# Altium PCB Power Supply.PcbDoc (part 2 of 2)
Units mm, origin at the board's own origin, x right, y up, seen from the top; angles counter-clockwise.
Board outline 95 x 55 mm, 2 copper layers (Top Layer, Bottom Layer); 70 components, 47 nets, 218 pads, 358 vias.
Unrouted connection lines stored in the file: 83.
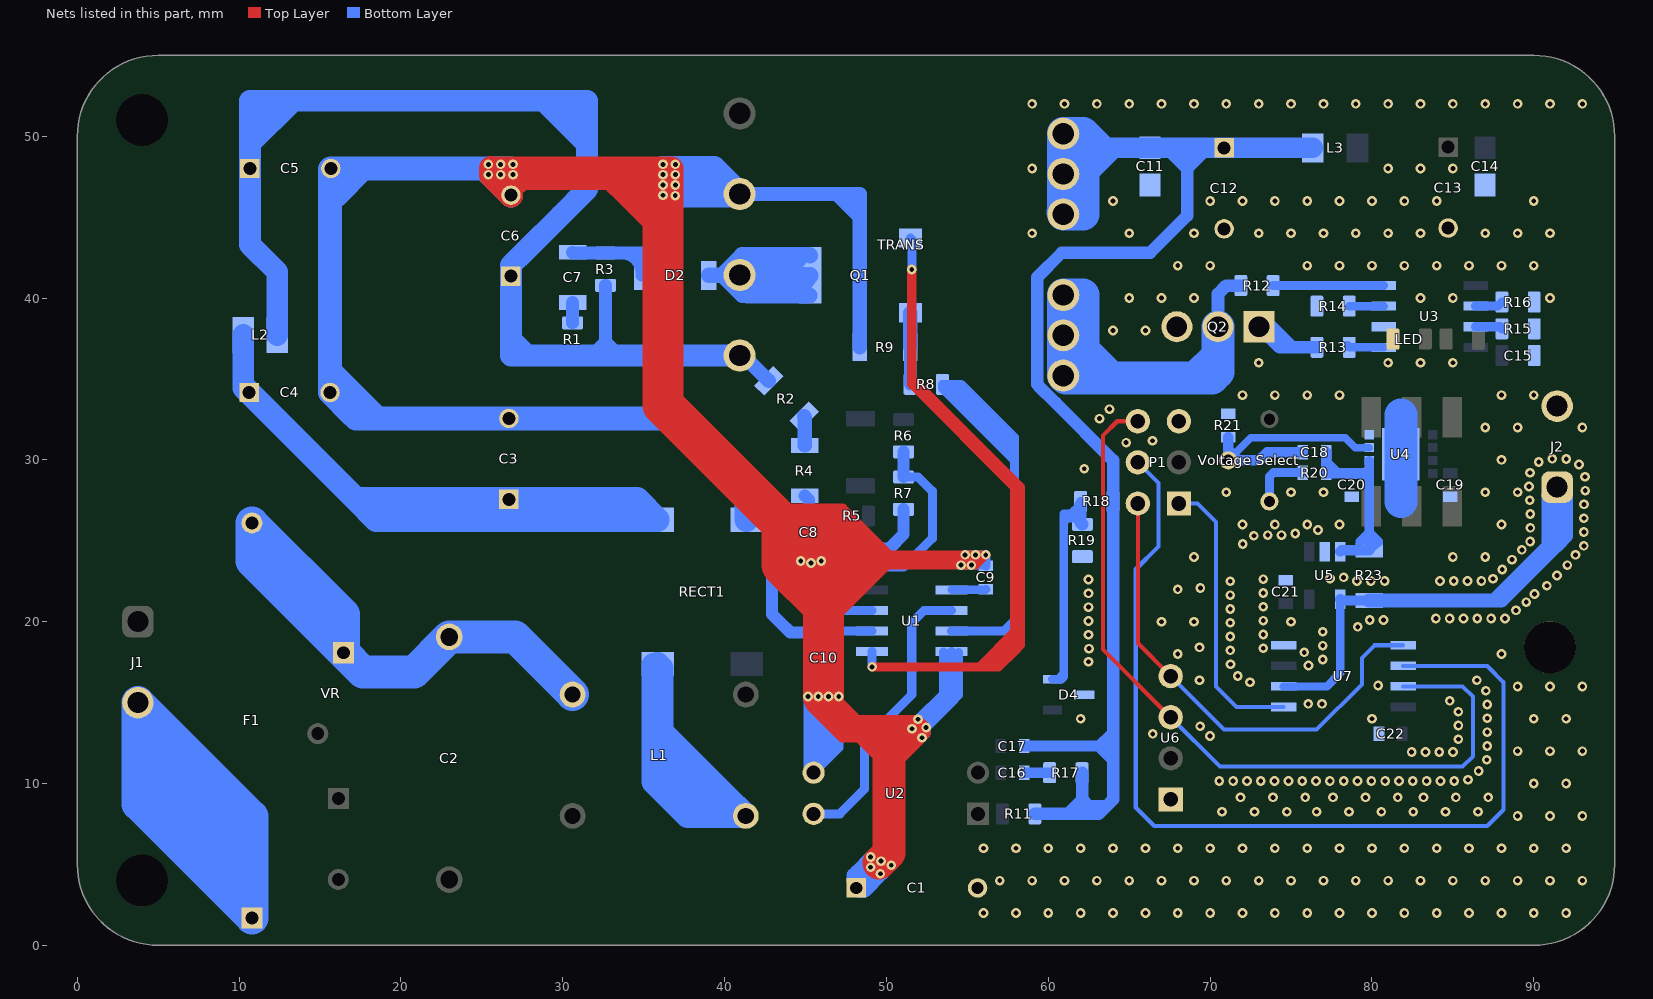
[diagram p2: the nets of this part, all layers, seen from the top]

## Via types
v1: diameter 0.6, hole 0.3, Top Layer to Bottom Layer, tented both sides, 358 vias

## Nets (pads, with @x,y where several pads share a name; then routed paths per layer and width w, separated by ;. In a path a pad name is that pad's centre, name@x,y a point inside that pad or via, vN(x,y) a via of type N, cw(c..) or ccw(c..) an arc to the next point about the centre after c; other vN are vias at no path point) (continued)
MISO: P1.5 U7.6 | length 60.6
  Bottom Layer w0.254: P1.5@65.532,29.845 66.802,28.575 66.802,24.638 65.405,23.241 65.405,8.509 66.548,7.366 87.122,7.366 88.138,8.382 88.138,16.256 87.122,17.272 U7.6@81.928,17.272
MOS_OUT: Q1.3 R8.2 R9.2 | length 4.4
  Bottom Layer w0.762: R8.2@51.451,34.671 51.461,34.681 R9.2@51.461,36.957
  Bottom Layer w0.813: Q1.3@51.461,39.076 Q1.3@51.487,39.102
  Bottom Layer w0.889: R9.2@51.461,36.957 Q1.3@51.461,39.076
MOSI/SDA: P1.4 U6.4 U7.5 | length 30.4
  Top Layer w0.254: P1.4@65.532,27.305 65.532,26.924 65.532,18.669 U6.4@67.564,16.637
  Bottom Layer w0.254: U6.4@67.564,16.637 70.866,13.335 76.581,13.335 79.375,16.129 79.375,17.758 80.159,18.542 U7.5@81.928,18.542
N: C2.2 F1.2 L1.1 VR.1 | length 37.7
  Bottom Layer w2.032: L1.1@30.607,15.501 27.044,19.064 C2.2@22.987,19.064 20.814,16.891 17.649,16.891 VR.1@16.459,18.081 ; VR.1@16.459,18.081 16.459,20.436 F1.2@10.795,26.1 10.795,23.745 VR.1@16.459,18.081
N_Filt: L1.3 RECT1.2 | length 44.3
  Bottom Layer w1.5: RECT1.2@35.607,17.316 35.607,10.113 35.858,9.862 ; 36.104,10.853 36.104,11.057 ; 36.812,11.311 38.835,9.287 40.021,9.287 ; 35.858,9.862 35.858,11.303 ; 35.858,9.862 37.719,8.001 39.16,8.001 ; 35.858,11.303 36.104,11.057 ; 35.858,11.303 35.858,13.208 ; 35.858,13.208 RECT1.2@35.858,17.384 36.104,17.138 36.104,13.204 ; 35.858,13.208 36.1,13.208 36.104,13.204 ; 36.104,11.057 39.16,8.001 ; 36.104,11.057 36.104,13.204 ; 36.104,13.204 40.021,9.287 ; 39.16,8.001 L1.3@41.307,8.001 40.021,9.287
N_RAW: F1.1 J1.2 | length 52.1
  Bottom Layer w2.032: 3.75,10.982 3.75,12.573 ; 3.75,10.982 3.75,8.745 F1.1@10.795,1.7 10.795,3.937 ; 3.75,10.982 10.795,3.937 ; 3.75,12.573 J1.2@3.75,15 10.795,7.955 10.795,6.096 ; 3.75,12.573 10.227,6.096 10.795,6.096 ; 10.795,3.937 10.795,6.096
PRI_CS: R8.1 U1.3 | length 33.4
  Bottom Layer w0.559: U1.3@54.026,19.431 57.277,19.431 57.912,20.066 57.912,29.972 ; 54.031,34.671 54.031,34.552 57.912,30.67 ; 54.031,34.671 54.61,34.671 57.912,31.369 57.912,30.67 ; 54.031,34.671 R8.1@53.451,34.671 53.451,34.433 57.912,29.972 ; 57.912,29.972 57.912,30.67
PRI_FB: U1.2 U2.4 | length 18.1
  Bottom Layer w0.559: U2.4@45.497,8.128 47.117,8.128 48.641,9.652 48.641,12.573 51.562,15.494 51.562,19.939 52.324,20.701 U1.2@54.026,20.701
PRI_OUT: Q1.1 U1.5 | length 64
  Top Layer w0.559: v1(49.114,17.209) 55.753,17.209 ; v1@51.562,41.783 51.562,35.052 ; 51.562,35.052 51.562,34.671 57.912,28.321 57.912,27.276 ; 51.562,35.052 58.293,28.321 58.293,26.895 ; 55.753,17.209 56.261,17.209 ; 55.753,17.209 57.912,19.368 ; 56.261,17.209 56.935,17.209 57.912,18.187 ; 56.261,17.209 57.721,18.669 57.912,18.669 ; 57.912,18.187 58.293,18.568 58.293,26.895 ; 57.912,18.187 57.912,18.669 ; 57.912,18.669 57.912,19.368 ; 57.912,19.368 57.912,27.276 ; 57.912,27.276 58.293,26.895
  Bottom Layer w0.559: U1.5@49.098,18.161 49.114,18.146 v1(49.114,17.209) ; Q1.1@51.487,43.702 51.566,43.623 v1(51.566,41.764)
PRI_OVP: R6.1 R7.2 U1.7 | length 17.2
  Bottom Layer w0.559: U1.7@49.098,20.701 47.498,20.701 47.117,21.082 47.117,22.86 47.625,23.368 51.054,23.368 52.832,25.146 52.832,28.067 51.959,28.94 R7.2@51.054,28.94
  Bottom Layer w0.762: R7.2@51.054,28.94 R6.1@51.054,30.496
PRI_SS: C9.2 U1.1 | length 2.1
  Bottom Layer w0.533: U1.1@54.026,21.971 54.038,21.984 56.122,21.984 C9.2@56.147,22.009
PRI_VDD: C8.2 C10.2 R4.1 R5.1 U1.6 | length 17
  Bottom Layer w0.559: C10.2@46.137,19.33 46.238,19.431 U1.6@49.098,19.431
  Bottom Layer w0.762: R4.1@44.958,27.787 45.212,27.533 C8.2@45.212,26.527 ; C10.2@46.137,19.33 44.063,19.33 43.943,19.45 43.58,19.813 43.146,20.246 42.926,20.467 42.926,24.638 44.815,26.527 C8.2@45.212,26.527 ; R5.1@46.879,26.543 46.879,26.527 C8.2@45.212,26.527
"Primary +": D2.1 Q1.2 TRANS.4 | length 33.1
  Bottom Layer w0.965: D2.1@39.027,41.402 39.871,41.402 ; TRANS.4@40.927,40.632 41.392,40.167 ; 41.784,42.665 41.395,42.665 ; 41.797,40.167 41.392,40.167 ; Q1.2@45.241,40.157 41.402,40.157 41.392,40.167 ; Q1.2@45.285,42.629 45.241,42.672 41.402,42.672 41.395,42.665 ; 39.841,41.433 41.073,42.665 41.395,42.665 ; 39.841,41.433 39.871,41.402 ; 39.841,41.433 40.163,41.433 TRANS.4@40.927,42.197 ; 39.871,41.402 41.106,40.167 41.392,40.167 ; 39.871,41.402 40.927,41.402 TRANS.4@40.927,41.427 TRANS.4@40.927,42.197 ; TRANS.4@40.927,42.197 41.395,42.665
  Bottom Layer w1.041: 43.556,41.395 43.562,41.402 ; 43.793,42.117 41.617,42.117 TRANS.4@40.927,41.427 TRANS.4@40.952,41.402 ; 43.982,40.683 41.671,40.683 TRANS.4@40.952,41.402 ; 44.578,42.418 43.562,41.402 ; TRANS.4@40.952,41.402 43.562,41.402 ; 43.562,41.402 44.578,40.387 Q1.2@45.287,41.402 43.562,41.402
"Primary -": C5.1 C6.1 L2.2 R1.2 R2.2 R3.2 TRANS.6 | length 89.5
  Bottom Layer w0.787: 31.931,36.587 32.639,37.295 ; 32.639,36.955 32.639,37.295 ; R3.2@32.639,40.783 32.639,37.295 ; 33.347,36.587 32.639,37.295 ; TRANS.6@40.927,36.447 TRANS.6@41.15,36.447
  Bottom Layer w0.889: TRANS.6@41.15,36.447 R2.2@42.719,34.878
  Bottom Layer w1.346: 11.811,51.816 11.811,50.864 10.668,50.864 ; L2.2@12.353,37.719 12.353,41.622 10.668,43.307 C5.1@10.668,48.006 10.668,49.53 ; TRANS.6@40.927,36.447 27.815,36.447 ; 10.668,49.53 10.668,50.864 ; 10.668,49.53 13.335,52.197 ; 10.668,50.864 10.668,52.197 13.335,52.197 ; 13.335,52.197 14.732,52.197 28.829,52.197 ; 26.797,37.465 26.797,36.447 27.815,36.447 ; 26.797,37.465 27.815,36.447 ; 26.797,37.465 C6.1@26.797,41.355 26.797,42.022 27.68,42.905 27.692,42.905 29.891,45.105 29.891,45.116 31.496,46.721 31.496,49.53 ; 28.829,52.197 29.845,52.197 ; 28.829,52.197 31.496,49.53 ; 29.845,52.197 31.496,52.197 31.496,50.546 ; 29.845,52.197 31.496,50.546 ; 31.496,49.53 31.496,50.546
R2C: C7.2 R1.1 | length 1.3
  Bottom Layer w0.787: R1.1@30.607,38.465 C7.2@30.607,39.725
RST: P1.1 U7.1 | length 17.6
  Bottom Layer w0.254: P1.1@68.072,27.305 69.215,27.305 70.358,26.162 70.358,16.002 71.628,14.732 U7.1@74.536,14.732
S_EN: R16.1 U3.2 | length 1.7
  Bottom Layer w0.559: U3.2@86.411,39.497 87.773,39.497 R16.1@88.027,39.751
S_Gate: R13.1 U3.5 | length 2.3
  Bottom Layer w0.533: R13.1@78.486,37.068 R13.1@78.597,36.957 U3.5@80.721,36.957
S_Gate_In: Q2.1 R13.2 | length 6.7
  Bottom Layer w0.787: R13.2@76.597,36.957 75.057,36.957 ; 75.057,36.957 74.295,36.957 Q2.1@73.025,38.227 73.787,38.227 75.057,36.957
S_TON: R15.1 U3.3 | length 1.7
  Bottom Layer w0.559: U3.3@86.411,38.227 87.9,38.227 R15.1@88.027,38.1
S_VD: R12.1 U3.8 | length 6.8
  Bottom Layer w0.559: R12.1@73.898,40.767 U3.8@80.721,40.767
S_Vs: R14.1 U3.7 | length 2.1
  Bottom Layer w0.533: R14.1@78.597,39.497 U3.7@80.721,39.497
SCK/SCL: P1.6 U6.3 U7.7 | length 50.1
  Top Layer w0.254: P1.6@65.532,32.385 64.262,32.385 63.373,31.496 63.373,18.288 U6.3@67.564,14.097
  Bottom Layer w0.254: U6.3@67.564,14.097 70.612,11.049 85.598,11.049 86.233,11.684 86.233,15.367 85.598,16.002 U7.7@81.928,16.002
SEC+: C11.1 C12.1 C17.1 L3.1 R11.1 R17.1 R18.2 TRANS.11 TRANS.12 TRANS.13 | length 106.5
  Bottom Layer w0.66: C17.1@58.509,12.319 63.119,12.319 ; 63.119,12.283 63.881,11.521 ; 64.008,12.319 63.119,12.319 ; 64.008,13.081 63.881,13.081 63.119,12.319
  Bottom Layer w0.762: R11.1@59.166,8.128 61.214,8.128 ; 59.403,34.576 60.451,33.528 ; 59.403,34.577 59.309,34.671 59.309,41.275 60.833,42.799 66.294,42.799 68.58,45.085 68.58,48.006 ; 60.452,33.528 64.008,29.972 64.008,27.432 64.008,13.081 64.008,12.319 64.008,9.017 63.581,8.59 ; R17.1@62.103,10.668 62.103,9.017 ; 62.324,8.604 62.339,8.59 62.53,8.59 ; 67.437,49.149 68.58,48.006 ; 68.58,49.276 68.58,48.006 ; 69.723,49.276 69.723,49.149 68.58,48.006 ; 61.214,8.128 62.103,8.128 ; 61.214,8.128 62.103,9.017 ; 62.103,8.128 62.103,9.017 ; 62.103,8.128 62.992,8.128 ; 62.103,9.017 62.53,8.59 ; 62.53,8.59 62.992,8.128 ; 62.53,8.59 63.581,8.59 ; 62.992,8.128 63.119,8.128 63.581,8.59
  Bottom Layer w1.27: 62.153,47.421 62.399,47.667 ; 62.153,47.667 62.399,47.667 ; 63.034,49.276 64.008,49.276 ; L3.1@76.34,49.276 C12.1@70.866,49.276 69.723,49.276 68.58,49.276 64.008,49.276 ; 62.399,47.667 64.008,49.276
  Bottom Layer w2.032: TRANS.11@60.898,45.311 TRANS.11@60.927,45.34 ; 63.034,49.276 62.153,50.157 ; TRANS.11@60.927,45.177 62.153,46.403 ; TRANS.11@60.927,45.177 TRANS.11@60.927,45.34 ; TRANS.11@60.927,45.177 62.153,45.177 62.153,46.403 ; TRANS.11@60.927,45.34 62.153,46.566 ; TRANS.11@60.927,45.34 TRANS.12@60.927,47.667 ; TRANS.12@60.927,47.667 62.153,47.667 ; TRANS.12@60.927,47.667 TRANS.13@60.927,50.157 62.153,50.157 ; 62.153,46.403 62.153,46.566 ; 62.153,46.566 62.153,47.421 62.153,47.667 ; 62.153,47.667 62.153,50.157
SEC-: Q2.2 R12.2 TRANS.7 TRANS.8 TRANS.9 | length 35.6
  Bottom Layer w0.787: 69.088,35.052 69.71,34.43 ; 70.485,35.433 70.879,35.433 ; Q2.2@70.501,38.243 Q2.2@70.485,38.227 70.485,40.259 70.993,40.767 R12.2@71.898,40.767
  Bottom Layer w2.032: Q2.2@70.485,38.227 70.485,36.449 ; TRANS.7@60.927,35.207 61.082,35.052 63.881,35.052 ; TRANS.7@60.927,35.207 62.153,35.207 62.153,36.78 ; TRANS.7@60.927,35.207 TRANS.8@60.927,37.697 ; TRANS.8@60.927,37.697 TRANS.9@60.927,40.187 62.153,40.187 62.153,37.697 ; TRANS.8@60.927,37.697 62.153,37.697 ; 62.153,36.78 62.153,37.697 ; 62.153,36.78 63.881,35.052 ; 63.881,35.052 69.088,35.052 ; 69.088,35.052 70.104,35.052 70.485,35.433 70.485,36.449 ; 69.088,35.052 70.485,36.449
SGND: C1.2 C11.2 C12.2 C13.2 C14.2 C15.1 C19.1 C20.1 C21.1 C22.1 D4.3 J2.2 LED.1 P1.3 pad.1@91,18.415 Q2.3 R14.2 R15.2 R16.2 R19.1 R21.2 U3.6 U4.4 U4.9 U5.2 U6.1 U7.4 | length 5.3
  Bottom Layer w2.032: 81.788,27.432 U4.9@81.788,30.353 81.788,32.766
  other v1: 56,2 58,2 60,2 62,2 64,2 66,2 68,2 70,2 72,2 74,2 76,2 78,2 80,2 82,2 84,2 86,2 88,2 90,2 92,2 57,4 59,4 61,4 63,4 65,4 67,4 69,4 71,4 73,4 75,4 77,4 79,4 81,4 83,4 85,4 87,4 89,4 91,4 93,4 56,6 58,6 60,6 62,6 64,6 66,6 68,6 70,6 72,6 74,6 76,6 78,6 80,6 82,6 84,6 86,6 88,6 90,6 92,6 89,8 91,8 93,8 70.739,8.255 72.739,8.255 74.739,8.255 76.581,8.255 78.581,8.255 80.581,8.255 82.55,8.255 84.55,8.255 86.55,8.255 71.882,9.144 73.882,9.144 75.882,9.144 77.597,9.144 79.597,9.144 81.597,9.144 83.185,9.144 85.185,9.144 87.185,9.144 90,10 92,10 70.568,10.161 71.422,10.155 72.276,10.155 73.13,10.155 73.984,10.155 74.838,10.155 75.692,10.155 76.546,10.155 77.4,10.155 78.254,10.155 79.108,10.155 79.962,10.155 80.816,10.155 81.67,10.155 82.524,10.155 83.378,10.155 84.232,10.155 85.086,10.155 85.936,10.233 86.593,10.779 87.094,11.471 82.451,11.943 83.305,11.943 84.159,11.943 85.013,11.943 89,12 91,12 93,12 87.127,12.324 85.339,12.732 69.987,12.938 66.458,13.072 87.127,13.178 69.383,13.542 85.339,13.586 62,14 80,14 90,14 92,14 87.127,14.032 85.339,14.44 87.127,14.886 76.062,14.922 76.916,14.922 84.807,15.108 87.037,15.735 89,16 91,16 93,16 80.384,16.062 72.47,16.258 69.342,16.383 86.481,16.384 71.708,16.645 76.08,17.293 71.263,17.373 62.484,17.526 76.959,17.667 68,18 88,18 75.817,18.106 71.248,18.227 62.51,18.336 73.278,18.36 69.342,18.415 76.959,18.521 71.248,19.081 62.484,19.19 73.278,19.214 76.959,19.375 79.119,19.679 71.248,19.935 67,20 69,20 75,20 62.484,20.044 73.278,20.068 79.861,20.102 80.715,20.102 83.947,20.193 84.801,20.193 85.655,20.193 86.509,20.193 87.363,20.193 88.217,20.193 88.9,20.701 71.248,20.789 62.484,20.898 73.278,20.922 89.535,21.209 71.248,21.643 90.043,21.717 62.484,21.752 73.278,21.776 68,22 69.396,22.089 90.805,22.225 71.248,22.497 79.076,22.518 79.93,22.521 80.784,22.521 84.2,22.521 85.054,22.521 85.908,22.521 86.762,22.521 62.484,22.606 73.278,22.63 77.401,22.667 87.479,22.658 78.251,22.741 91.44,22.86 88.052,23.231 92.075,23.495 88.656,23.835 69,24 85,24 87,24 92.583,24.13 89.26,24.439 93.093,24.688 72.012,24.807 89.776,24.955 72.704,25.308 73.557,25.35 74.411,25.35 75.26,25.445 93.093,25.542 76.66,25.666 89.787,25.797 72,26 74,26 76,26 78,26 88,26 93.093,26.396 89.784,26.651 93.097,27.25 89.75,27.505 71,28 75,28 77,28 87,28 89,28 93.181,28.099 89.699,28.357 93.167,28.953 89.77,29.208 62.225,29.448 92.787,29.718 90.306,29.873 88,30 92.001,30.052 91.139,30.062 64.809,31.063 66.441,31.184 87,32 89,32 93,32 63.16,32.547 63.781,33.133 72,34 74,34 76,34 78,34 88,34 90,34 73,36 81,36 83,36 85,36 64,38 66,38 65,40 67,40 69,40 83,40 85,40 91,40 68,42 70,42 76,42 78,42 80,42 82,42 84,42 86,42 88,42 90,42 59,44 65,44 69,44 73,44 75,44 77,44 79,44 81,44 83,44 87,44 89,44 91,44 64,46 70,46 72,46 74,46 76,46 78,46 80,46 82,46 84,46 90,46 59,48 81,48 83,48 85,48 59,52 61,52 63,52 65,52 67,52 69,52 71,52 73,52 75,52 77,52 79,52 81,52 83,52 85,52 87,52 89,52 91,52 93,52
Snub: C7.1 D2.2 R3.1 | length 7.6
  Bottom Layer w0.787: C7.1@30.607,42.825 ccw(c30.649,42.825) 30.649,42.783 R3.1@32.639,42.783 33.655,42.783 ; D2.2@34.887,41.402 D2.2@34.887,41.551 ; 33.655,42.783 cw(c33.655,41.551) D2.2@34.887,41.551 ; 33.655,42.783 34.887,42.783 D2.2@34.887,41.551
"Snub 2": C16.1 R17.2 | length 1.6
  Bottom Layer w0.66: C16.1@58.509,10.668 R17.2@60.087,10.668
TL431: D4.2 R18.1 R19.2 | length 16.6
  Bottom Layer w0.533: D4.2@60.249,16.444 D4.2@60.623,16.444 ; 60.896,16.717 D4.2@60.623,16.444 ; R19.2@61.992,26.098 R19.2@61.698,26.392 ; 61.992,26.781 61.881,26.67 61.42,26.67 ; R18.1@61.992,27.432 61.992,27.241 61.42,26.67 ; D4.2@60.623,16.444 60.816,16.444 60.96,16.588 60.96,26.162 ; 60.96,26.162 61.19,26.392 ; 60.96,26.162 60.96,26.67 61.42,26.67 ; 61.19,26.392 61.42,26.622 61.42,26.67 ; 61.19,26.392 R19.2@61.698,26.392 ; 61.42,26.67 R19.2@61.698,26.392
  Bottom Layer w0.762: R18.1@61.992,27.241 61.992,26.781 61.992,26.13 R19.2@62.103,26.019
V_RAW+: C3.1 C4.1 L2.1 RECT1.1 | length 56.7
  Bottom Layer w1.346: 10.253,35.814 C4.1@10.253,34.641 ; L2.1@10.253,37.719 C4.1@10.253,34.641 ; C4.1@10.623,34.051 10.253,34.421 C4.1@10.253,34.531 ; C4.1@10.634,34.176 C4.1@10.621,34.163 C4.1@10.253,34.531 ; C4.1@10.634,34.176 C4.1@10.253,34.531 ; C4.1@11.097,33.797 C4.1@10.253,34.641 ; C4.1@10.253,34.531 C4.1@10.253,34.641
  Bottom Layer w1.5: C4.1@10.621,34.163 17.225,27.559 ; 17.225,27.559 18.48,26.304 27.925,26.304 ; 17.225,27.559 C3.1@26.67,27.559 ; C3.1@26.67,27.559 34.603,27.559 RECT1.1@35.858,26.304 27.925,26.304 ; C3.1@26.67,27.559 27.925,26.304
V_RAW-: C1.1 C3.2 C4.2 C5.2 C6.2 C8.1 C9.1 C10.1 R7.1 R9.1 RECT1.4 TRANS.3 U1.4 U2.3 | length 365.9
  Top Layer w0.508: C6.2@27.122,46.435 27.686,46.999 27.686,47.44
  Top Layer w0.559: 45.347,15.061 45.347,14.724 46.101,13.97 ; 45.989,27.017 47.298,27.017 49.565,24.75 ; 46.101,26.035 47.895,26.035 49.18,24.75 ; 46.261,14.465 47.117,13.609 47.117,13.462 ; v1(47.053,15.373) 47.053,15.117 48.199,13.97 ; 47.204,13.214 47.293,13.125 48.768,13.125 ; 48.133,13.208 48.387,13.462 ; 48.795,24.75 49.18,24.75 ; 49.4,22.853 50.042,23.495 ; 49.515,12.076 49.436,12.156 ; 49.524,12.156 49.436,12.156 ; 49.728,23.826 55.168,23.826 v1@55.499,23.495 ; 49.812,11.518 49.569,11.518 48.26,12.827 ; 46.101,13.97 46.101,15.373 47.504,13.97 48.199,13.97 ; 46.101,13.97 46.863,13.208 ; 46.863,13.208 47.244,12.827 48.26,12.827 ; 46.863,13.208 47.117,13.462 ; 47.117,13.462 48.387,13.462 ; 48.199,13.97 48.895,13.97 ; 48.26,12.827 48.768,12.827 ; 48.387,13.462 v1(52.451,13.462) ; 48.387,13.462 48.895,13.97 ; 48.768,12.827 50.165,12.827 51.181,12.827 v1(52.197,12.827) ; 48.768,12.827 48.768,13.125 ; 48.768,12.827 48.768,12.823 49.436,12.156 ; 48.768,13.125 49.24,13.125 49.323,13.208 50.165,13.208 51.562,13.208 52.197,13.208 ; 48.895,13.97 v1(51.943,13.97) v1(52.451,13.462) ; 49.18,24.75 49.565,24.75 ; 49.565,24.75 50.185,24.13 ; 50.042,23.495 v1(54.61,23.495) v1(55.245,23.495) v1@55.499,23.495 ; 50.042,23.495 48.641,23.495 49.276,24.13 50.185,24.13 ; 50.185,24.13 v1(54.864,24.13) v1(55.499,24.13) v1(56.134,24.13) v1@55.499,23.495 ; v1(52.197,12.827) 52.451,13.081 v1(52.451,13.462) ; v1(52.197,12.827) 52.197,13.208 ; 52.197,13.208 v1(52.451,13.462)
  Top Layer w1.5: v1@25.56,48.028 25.56,47.592 C6.2@26.797,46.355 26.797,47.034 27.203,47.44 ; 25.624,48.013 25.634,48.004 v1@26.784,48.004 ; v1@25.663,47.695 25.663,47.901 25.869,47.901 ; 26.67,47.44 27.203,47.44 ; v1@26.797,48.006 33.274,48.006 ; 27.279,47.516 27.203,47.44 ; 27.203,47.44 27.686,47.44 32.708,47.44 33.274,48.006 ; 33.274,48.006 34.925,46.355 v1(36.195,46.355) ; 33.274,48.006 34.544,48.006 ; 34.544,48.006 v1(36.195,46.355) ; 34.544,48.006 36.703,48.006 36.703,46.482 36.576,46.355 v1(36.195,46.355)
  Top Layer w2.032: v1@49.53,5.08 v1(49.657,5.207) 50.165,5.715 50.165,11.811 ; 50.165,13.208 50.165,12.827 50.165,11.811 ; v1@51.562,13.208 51.181,12.827 50.165,11.811
  Top Layer w2.54: 33.725,47.394 33.759,47.394 36.195,44.958 ; v1(36.195,46.99) v1(36.195,46.355) 36.195,44.958 ; 46.101,15.373 46.101,20.955 ; 36.195,44.958 36.195,33.401 43.561,26.035 ; 43.561,26.035 v1@46.101,23.495 ; 43.561,26.035 43.561,23.495 46.101,20.955 ; 43.561,26.035 46.101,26.035 48.641,23.495 ; 46.101,20.955 v1@46.101,23.495 ; 46.101,20.955 48.641,23.495 ; v1@46.101,23.495 48.641,23.495
  Bottom Layer w0.559: U2.3@45.476,10.763 45.49,10.777 v1@45.49,15.373 ; 46.069,11.636 45.88,11.825 v1@45.88,15.373 ; 46.174,15.011 46.089,14.926 46.089,11.486 45.783,11.792 ; 46.73,12.269 46.894,12.433 v1@46.894,15.373 ; 52.163,13.559 52.213,13.559 v1@52.284,13.629 ; U1.4@53.53,18.134 53.53,15.557 v1(51.943,13.97) ; U1.4@54.026,18.161 54.026,15.372 ; U1.4@54.449,18.085 54.449,15.46 54.026,15.037 ; v1@54.865,23.841 55.763,23.841 C9.1@56.109,23.495 ; v1(45.148,15.373) 46.005,16.23 C10.1@46.137,16.23 ; v1(45.148,15.373) v1@45.49,15.373 ; v1(45.148,15.373) 45.148,11.017 U2.3@45.497,10.668 U2.3@45.783,10.954 ; v1(45.339,23.622) C8.1@45.339,24.4 ; v1(45.339,23.622) 44.831,23.622 v1(44.704,23.749) 45.212,24.257 C8.1@45.212,24.527 C8.1@45.339,24.4 ; v1(45.339,23.622) 45.847,23.622 v1(45.974,23.749) 45.974,23.765 C8.1@45.339,24.4 ; v1@45.49,15.373 v1(45.783,15.373) ; U2.3@45.783,10.954 45.783,11.792 ; U2.3@45.783,10.954 46.418,11.589 ; 45.783,11.792 v1(45.783,15.373) ; v1(45.783,15.373) v1@45.88,15.373 ; v1(45.783,15.373) v1@45.88,15.47 ; v1@45.88,15.373 v1@45.88,15.47 ; v1@45.88,15.373 v1(46.418,15.373) ; v1@45.88,15.47 46.137,15.727 C10.1@46.137,16.23 ; C10.1@46.137,16.23 46.418,15.95 v1(46.418,15.373) ; C10.1@46.137,16.23 46.196,16.23 v1@46.894,15.532 ; 46.418,11.589 47.053,12.224 v1(47.053,15.373) ; 46.418,11.589 v1(46.418,15.373) ; v1(46.418,15.373) v1@46.894,15.373 ; v1@46.894,15.373 v1@46.894,15.532 ; v1@46.894,15.373 v1(47.053,15.373) ; v1@46.894,15.532 v1(47.053,15.373) ; v1(51.581,13.385) 51.581,13.608 v1(51.943,13.97) ; v1(51.581,13.385) v1@51.639,13.385 ; v1(51.581,13.385) 51.943,13.746 v1(51.943,13.97) ; v1@51.639,13.385 v1@52.374,13.385 ; v1@51.639,13.385 v1(52.197,12.827) ; v1(51.943,13.97) v1@52.284,13.629 ; v1(52.197,12.827) 52.451,13.081 v1(52.451,13.462) ; v1(52.197,12.827) 52.197,13.208 v1@52.374,13.385 ; v1@52.284,13.629 54.026,15.372 ; v1@52.284,13.629 v1(52.451,13.462) ; v1@52.374,13.385 v1(52.451,13.462) ; v1(52.451,13.462) 54.026,15.037 ; 54.026,15.037 54.026,15.372 ; C9.1@56.109,23.495 v1(55.245,23.495) v1(54.61,23.495) 54.61,23.876 v1(54.864,24.13) v1(55.499,24.13) v1(56.134,24.13) 56.147,24.117 C9.1@56.147,23.457 C9.1@56.109,23.495
  Bottom Layer w0.762: RECT1.4@41,26.662 RECT1.4@41.358,26.304 ; C8.1@45.212,24.527 50.181,24.527 51.054,25.4 R7.1@51.054,26.94 ; C1.1@47.912,3.992 47.912,4.351 48.133,4.572 ; C1.1@48.292,3.337 48.676,3.337 v1@49.768,4.429 ; C1.1@48.133,3.55 49.022,4.439 v1(49.022,4.826) ; C1.1@48.133,3.55 48.133,4.572 ; C1.1@48.133,3.55 48.743,3.55 v1(49.622,4.429) ; 48.133,4.572 v1(49.022,5.461) ; v1(49.022,4.826) v1(49.022,5.461) ; v1(49.022,4.826) 49.419,4.429 v1(49.622,4.429) ; v1(49.022,5.461) 49.784,5.461 50.038,5.207 ; v1(49.622,4.429) 49.657,4.464 v1(49.657,5.207) 50.038,5.207 ; v1(49.622,4.429) v1@49.768,4.429 ; v1@49.768,4.429 v1(50.292,4.953) 50.038,5.207
  Bottom Layer w0.889: TRANS.3@40.999,46.355 TRANS.3@40.927,46.427 46.918,46.427 ; 48.158,45.673 48.158,45.909 47.64,46.427 ; R9.1@48.361,36.957 48.361,44.984 ; 46.918,46.427 47.64,46.427 ; 46.918,46.427 48.361,44.984 ; 47.64,46.427 48.361,46.427 48.361,44.984
  Bottom Layer w1.5: 19.05,32.559 18.531,32.559 ; v1(36.195,46.355) v1(36.195,46.99) v1(36.195,47.625) 36.195,48.007 v1@36.207,48.019 ; v1@36.296,48.016 39.338,48.016 39.752,47.602 ; v1@36.361,46.347 40.734,46.347 ccw(c40.734,46.62) TRANS.3@40.927,46.427 ; 36.556,47.084 39.234,47.084 39.752,47.602 ; 37.765,31.669 36.875,32.559 ; TRANS.3@40.855,46.355 TRANS.3@40.927,46.427 ; RECT1.4@41.358,26.304 41.358,28.076 36.875,32.559 ; 15.621,35.469 17.907,33.183 ; 15.621,35.469 15.621,46.355 ; 15.621,35.469 C4.2@15.621,34.163 16.935,32.849 ; 15.621,46.355 15.621,47.959 C5.2@15.668,48.006 17.653,48.006 ; 15.621,46.355 16.002,46.355 17.653,48.006 ; 16.935,32.849 17.225,32.559 17.893,32.559 ; 16.935,32.849 17.269,33.183 ; 17.269,33.183 17.893,32.559 ; 17.269,33.183 17.907,33.183 ; 17.653,48.006 25.146,48.006 ; 17.893,32.559 18.531,32.559 ; 17.907,33.183 18.531,32.559 ; 18.531,32.559 C3.2@26.67,32.559 36.875,32.559 ; 25.146,48.006 C6.2@26.797,46.355 26.797,48.006 25.146,48.006 ; 39.752,47.602 TRANS.3@40.927,46.427
  other v1: 36.945,46.329 36.957,46.99 25.4,47.625 26.162,47.625 26.924,47.625 36.957,47.625 25.4,48.26 26.162,48.26 26.924,48.26 36.195,48.26 36.957,48.26
Vadj_1: "Voltage Select.1" R20.1 | length 3.7
  Bottom Layer w0.559: 73.66,27.432 73.66,28.956 73.914,29.21 R20.1@75.73,29.21
Vadj_2: "Voltage Select.2" C18.1 R21.1 U4.3 | length 16.7
  Bottom Layer w0.457: 71.12,29.972 71.438,30.29 72.517,31.369 78.359,31.369 78.975,30.753 U4.3@79.832,30.753
  Bottom Layer w0.66: R21.1@71.12,31.407 71.12,30.607 ; C18.1@75.73,30.48 73.533,30.48 73.025,29.972 71.755,29.972 ; 71.12,30.607 71.438,30.29 71.755,29.972 ; 71.12,30.607 71.12,29.972 71.755,29.972
Voltage: J2.1 R23.2 U5.4 U7.2 | length 42.9
  Bottom Layer w0.508: U7.2@74.536,16.002 77.216,16.002 78.039,16.825 U5.4@78.039,21.385
  Bottom Layer w0.635: U5.4@78.039,21.385 78.113,21.311 R23.2@79.837,21.311
  Bottom Layer w0.889: R23.2@79.837,21.311 87.544,21.311 ; 90.921,24.787 90.921,27.802 J2.1@91.125,28.006 ; J2.1@91.974,28.302 91.974,25.295 91.506,24.826 ; 87.544,21.311 87.991,21.311 91.125,24.445 ; 87.544,21.311 91.125,24.892 ; 91.125,24.445 91.125,24.892 ; 91.125,24.445 91.506,24.826 ; 91.125,24.892 J2.1@91.125,28.006 ; J2.1@91.125,28.006 J2.1@91.44,28.321 91.506,28.255 91.506,24.826
Vout_RAW: C18.2 C20.2 R20.2 R23.1 U4.1 U4.2 U5.3 | length 15.8
  Bottom Layer w0.508: 79.832,28.769 79.449,29.153 79.832,29.536
  Bottom Layer w0.559: 79.273,24.892 79.273,24.968 79.832,25.527 ; 79.449,29.153 U4.1@79.832,29.153 ; R23.1@79.832,24.41 79.832,24.411 79.832,25.527 ; U4.2@79.832,29.953 79.832,29.536 U4.1@79.832,29.153 ; R23.1@79.837,24.411 80.317,24.892 80.391,24.892 80.391,24.968 79.832,25.527 ; 79.832,25.527 79.832,28.769 U4.1@79.832,29.153
  Bottom Layer w0.635: U5.3@78.039,24.335 78.115,24.411 79.832,24.411 R23.1@79.837,24.411
  Bottom Layer w0.66: C18.2@77.178,30.48 77.178,29.845 ; 79.449,29.153 78.759,29.153 C20.2@78.74,29.172 77.851,29.172 ; 77.178,29.845 R20.2@77.178,29.21 77.216,29.172 77.851,29.172 ; 77.178,29.845 77.851,29.172
Vstart: R2.1 R4.2 | length 1.8
  Bottom Layer w0.889: R2.1@44.911,32.686 44.958,32.639 R4.2@44.958,30.887
pads on no net: "Voltage Select.3" C8.0 C15.0 LED.0 R1.0 R3.0 R5.0 R6.0 R7.0 R8.0 R10.0 R11.0 R12.0 R13.0 R14.0 R15.0 R16.0 R17.0 R18.0 R19.0 SW1.3 SW1.4 SW1.5 SW1.6 U1.8 U3.1 U4.5

## Polygon pours and split planes (outlines as drawn)
SGND on Top Layer "NONET_L-01_P-001" (solid, remove dead copper, pour order 0): 58.674,54.12 58.674,34.071 60.389,32.356 60.349,32.316 60.349,17.931 54.483,12.065 54.483,1.143 55.626,0 103.632,0 103.632,53.975 101.854,55.753 101.092,54.991 59.436,54.991
SGND on Bottom Layer "q" (solid, remove dead copper, pour order 1): 58.615,54.052 58.615,34.13 60.389,32.356 60.349,32.316 60.349,17.931 54.483,12.065 54.483,1.143 55.626,0 103.632,0 103.632,53.975 101.854,55.753 101.092,54.991 59.436,54.991

## Silkscreen, mask and mechanical layers (free items; w line width, h text height)
Top Overlay:
  lines w1: 53.467,0.762 53.467,1.659 ; 57.023,22.606 57.023,25.019 ; 57.785,35.679 57.785,54.356
  text "High PSRR LDO" at 93.647,37.084 h1 r90
  text "DEBUG" at 78.232,34.544 h0.64
  text "NORMAL" at 83.185,34.544 h0.64
  text "Input:85VAC-265VAC" at 38.608,31.575 h1
  text "SCK" at 62.484,31.242 h0.64 r90
  text "GND" at 63.627,31.242 h0.64 r90
  text "Output:5VDC-3.3VDC 2A" at 38.481,29.67 h1
  text "5V" at 63.754,29.083 h0.64 r90
  text "MISO" at 62.611,28.575 h0.64 r90
  text "SMPS-Isolated Flyback" at 38.608,27.892 h1
  text "RST" at 63.754,26.162 h0.64 r90
  text "MOSI" at 62.611,26.035 h0.64 r90
  text "JLCJLCJLCJLC" at 23.345,7.135 h0.8 r90
Bottom Overlay:
  lines w0.6: 34.817,34.368 38.254,34.368 43.207,29.415 43.207,25.943 42.064,24.8 ; 55.88,20.32 56.642,20.32 57.103,20.781 57.103,23.956
  lines w1: 13.183,7.75 13.208,1.397 ; 27.171,50.126 28.702,48.595 28.702,46.497 ; 50.165,35.179 50.165,33.461 52.645,33.461 ; 53.467,0.762 53.467,1.659 ; 57.785,35.679 57.785,54.356
  text "Designed By:" at 56.694,53.046 h1
  text "Hatim Saad" at 56.694,51.189 h1
Top Solder:
  lines w1: 53.467,0.762 53.467,1.659 ; 57.023,22.606 57.023,25.019 ; 57.785,35.941 57.785,54.483
Bottom Solder:
  lines w0.6: 34.798,34.417 38.227,34.417 43.18,29.464 43.18,25.908 42.037,24.765 ; 55.88,20.32 56.642,20.32 57.103,20.781 57.103,23.956
  lines w1: 13.183,7.75 13.208,1.397 ; 27.171,50.126 28.721,48.576 28.721,46.501 ; 50.165,35.179 50.165,33.461 52.645,33.461 ; 53.467,0.508 53.467,1.659 ; 57.785,35.941 57.785,54.483
Mechanical 1:
  lines w0.254: 29.083,42.418 29.083,43.434 29.591,43.942 30.861,43.942 ; 49.905,33.591 51.562,33.591
Board Shape:
  drawing of 429 lines, arcs and shapes, not listed